# Altium PCB PCB1.PcbDoc
Units mm, origin at the board's own origin, x right, y up, seen from the top; angles counter-clockwise.
Board outline 52.07 x 50.16 mm, 2 copper layers (Top Layer, Bottom Layer); 9 components, 16 nets, 38 pads, 3 vias.
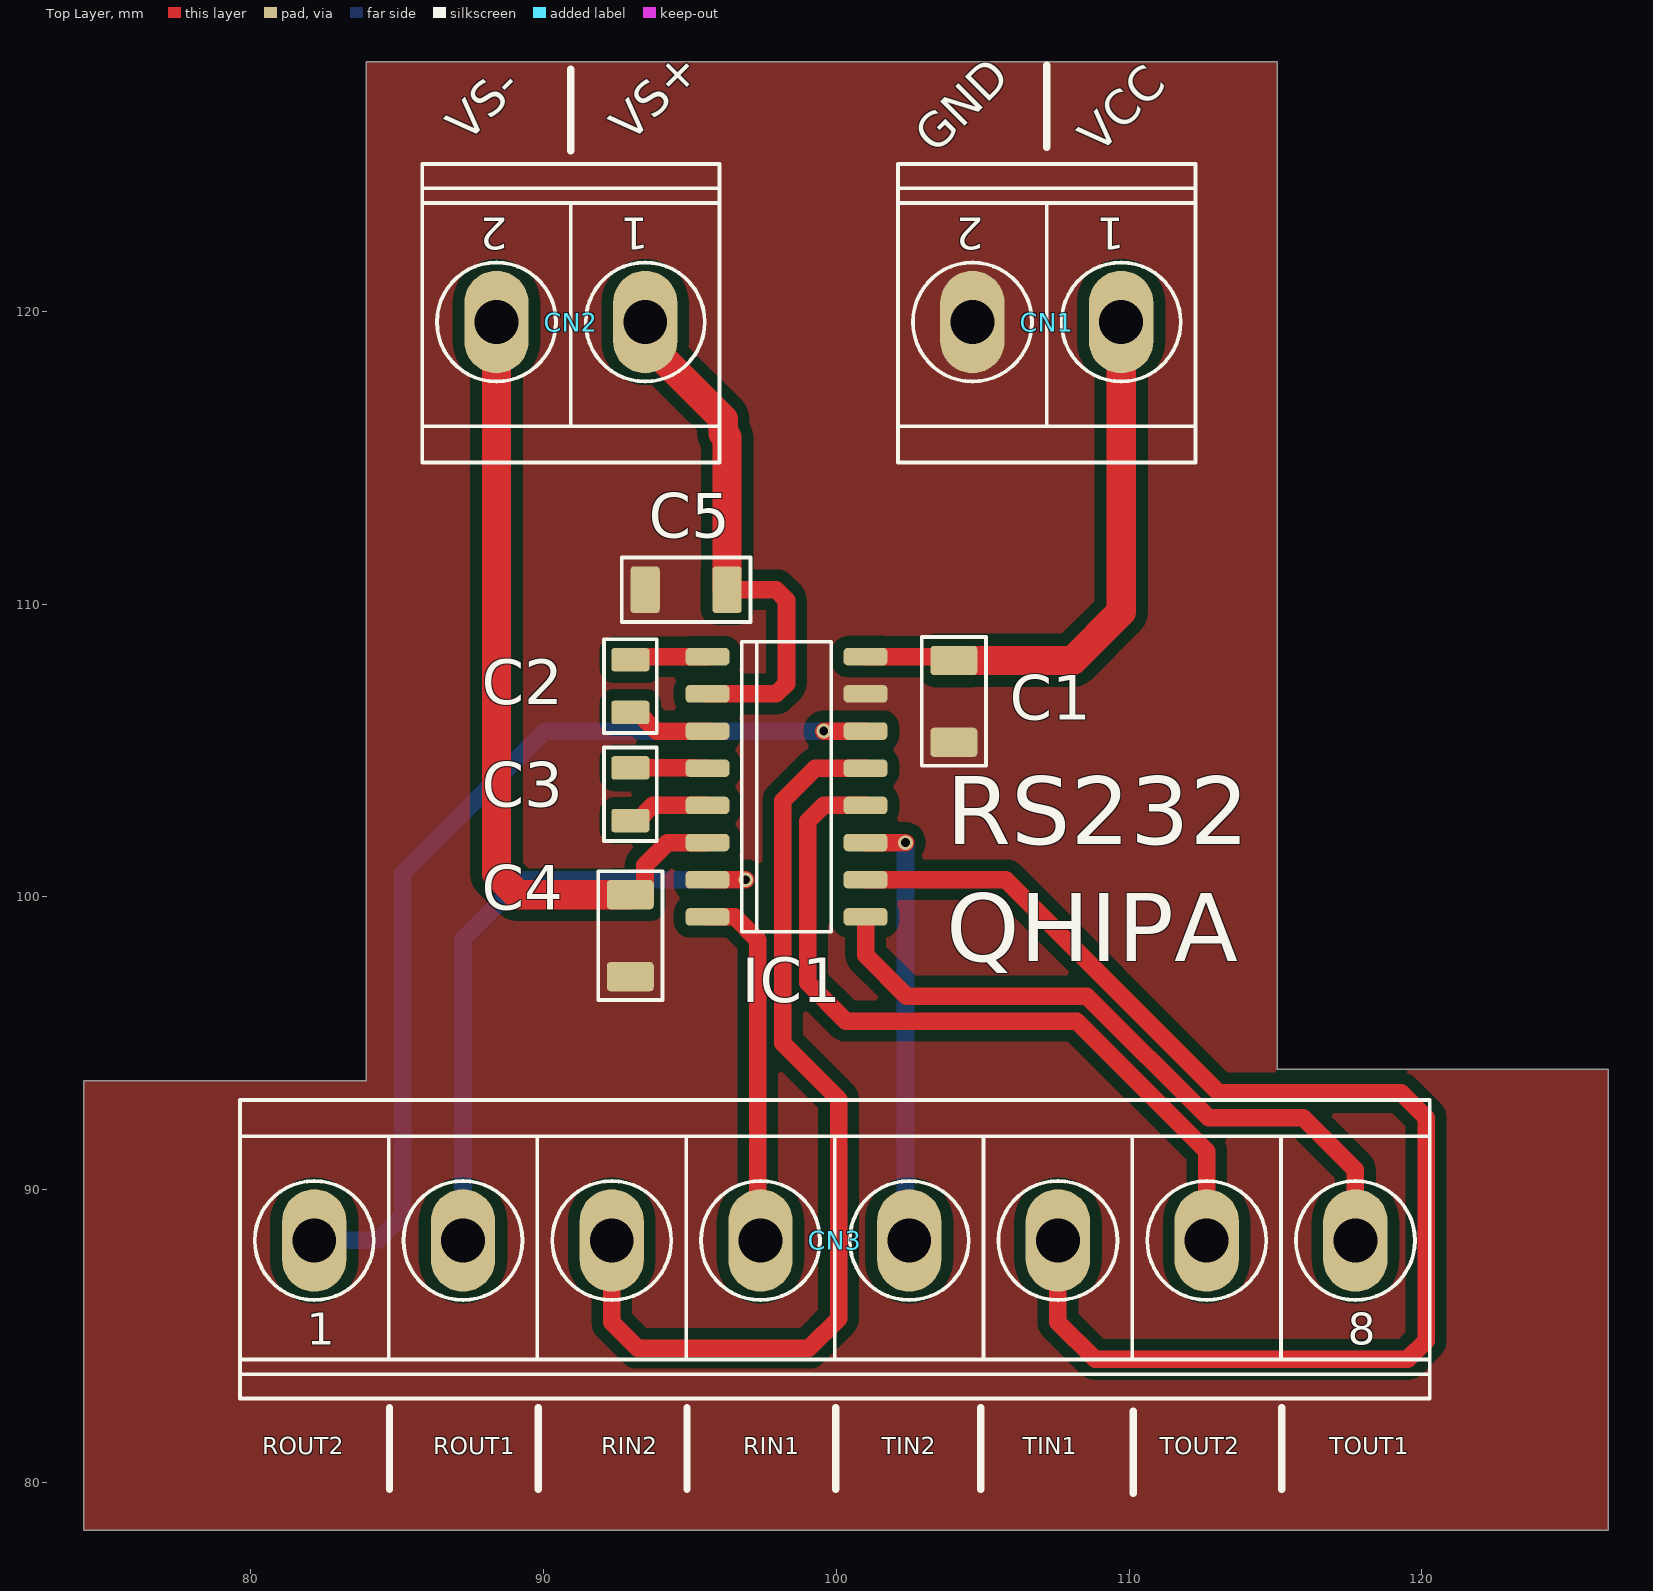
[diagram p0: Top Layer view]
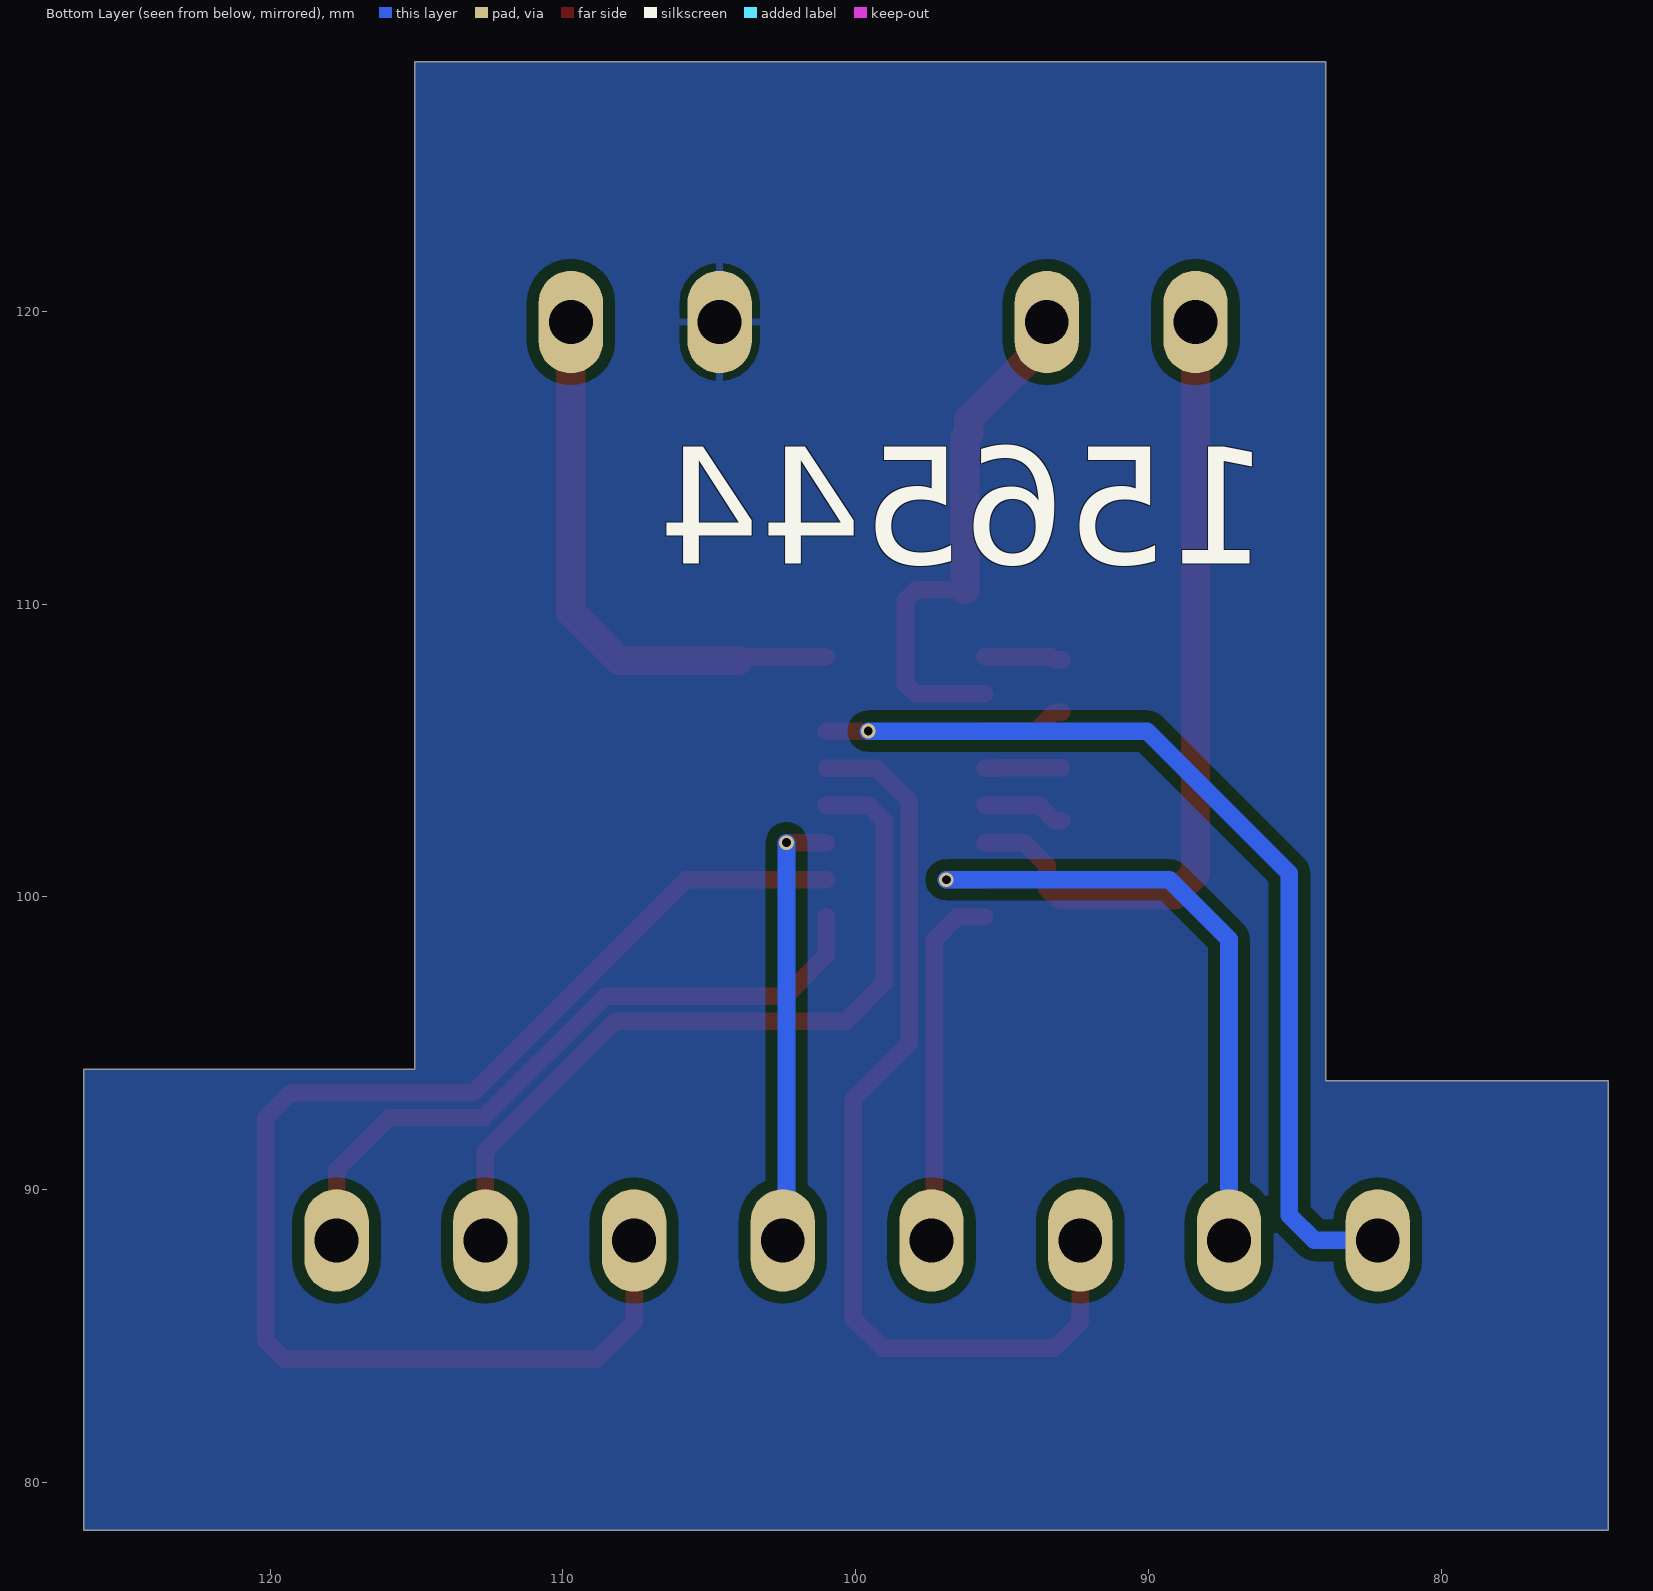
[diagram p1: Bottom Layer view, seen from below]

## Layer stack, top to bottom
Top Solder: solder mask 0.0102, Solder Resist, Dk 3.5
Top Layer: signal copper 0.0356
Dielectric 1: dielectric 0.32, FR-4, Dk 4.8
Bottom Layer: signal copper 0.0356
Bottom Solder: solder mask 0.0102, Solder Resist, Dk 3.5

## Board outline
74.295,78.359 74.295,93.726 83.947,93.726 83.947,128.524 115.062,128.524 115.062,94.107 126.365,94.107 126.365,78.359

## Design rules (kind name [scope] priority, off if disabled: settings)
Clearance [All] p1: gap=0.254 ignorepadtopadclearanceinfootprint=FALSE except(0: Arc-Hole Track-Hole SMDPad-Hole THPad-Hole Via-Hole Fill-Hole Poly-Hole Region-Hole Text-Hole; 0.4: Arc-Fill Arc-Poly Arc-Region Track-Fill Track-Poly Track-Region SMDPad-Fill SMDPad-Poly SMDPad-Region THPad-Fill THPad-Poly THPad-Region Via-Fill Via-Poly Via-Region Fill-Fill Fill-Poly Fill-Region Poly-Poly Poly-Region Region-Region)
PlaneConnect [All] p1: planeconnectstyle=Direct reliefexpansion=0.508 reliefentries=4 reliefconductorwidth=0.254 reliefairgap=0.254
PolygonConnect [All] p1: connectstyle=Direct reliefconductorwidth=0.254 reliefentries=4 polygonreliefangle="90 Angle" airgapwidth=0.254
RoutingVias [All] p1: holewidth=0.711 width=1.27 viastyle="Through Hole" minholewidth=0.711 minwidth=1.27 maxholewidth=0.711 maxwidth=1.27
SolderMaskExpansion [All] p1: expansion=0.102 istentingtop=FALSE
Width [All] p1: maxlimit=1 minlimit=0.4 preferedwidth=0.6
29 further rules are at their usual default settings.

## Components (designator, comment, footprint, x,y, rotation, side; value= is the part's Value field where it differs from the comment)
C1 "1uF" C1206 104.013,106.677 r270 top value=100nF
C2 "1uF" C0805 92.964,107.199 r270 top value=100nF
C3 "1uF" C0805 92.964,103.505 r270 top value=100nF
C4 "1uF" C1206 92.964,98.676 r90 top value=100nF
C5 "1uF" C1206 94.869,110.49 r0 top value=100nF
CN1 "TB508-02" TB508-02 107.188,119.634 r180 top
CN2 "TB508-02" TB508-02 90.932,119.634 r180 top
CN3 "TB08" TB508-08 99.949,88.265 r0 top
IC1 "MAX232EIDR" SOIC16-N 98.298,103.759 r0 top

## Footprints (in the part's own frame and the unit in brackets; to place one, negate y for a bottom-side part, rotate by r counter-clockwise, add the part's x,y. Pads: shape width x height; smd on the part's side, far side on the other; paste and mask are expansions set on the pad)
C0805 [mm] "Ceramic capacitor 0805"
  rrect25% 0.8x1.3 smd: 1(-0.9,0) 2(0.9,0)
  silkscreen extent -1.6,-0.9 1.6,0.9, body extent -1,-0.62 1,0.63, height 0.8
C1206 [mm] "SMT CAPACITOR 1206"
  rrect25% 1x1.6 smd: 1(-1.4,0) 2(1.4,0)
  silkscreen extent -2.2,-1.1 2.2,1.1, body extent -1.6,-0.8 1.6,0.8, height 0.94
SOIC16-N [mm] "SOIC16, 16-SOIC (0.154\", 3.90mm Width)"
  rrect50% 1.5x0.6 smd: 1(-2.7,4.445) 2(-2.7,3.175) 3(-2.7,1.905) 4(-2.7,0.635) 5(-2.7,-0.635) 6(-2.7,-1.905) 7(-2.7,-3.175) 8(-2.7,-4.445) 9(2.7,-4.445) 10(2.7,-3.175) 11(2.7,-1.905) 12(2.7,-0.635) 13(2.7,0.635) 14(2.7,1.905) 15(2.7,3.175) 16(2.7,4.445)
  silkscreen extent -1.52,-4.95 1.52,4.95, body extent -3,-4.95 3,4.95, height 1.4
TB508-02 [mm] "Vertical terminal block 0.2 inch (5.08mm) pitch"
  oval 2.2x3.5 hole 1.5: 1(-2.54,0) 2(2.54,0)
  silkscreen extent -5.08,-5.4 5.08,4.8, body extent -5.67,-4.75 5.06,4.75, height 15
TB508-08 [mm] "Vertical terminal block 0.2 inch (5.08mm) pitch"
  oval 2.2x3.5 hole 1.5: 1(-17.78,0) 2(-12.7,0) 3(-7.62,0) 4(-2.54,0) 5(2.54,0) 6(7.62,0) 7(12.7,0) 8(17.78,0)
  silkscreen extent -20.32,-5.4 20.32,4.8, body extent -20.86,-4.67 20.35,4.83, height 15.03

## Part data
C1 C2 C3 C4 C5: library part Capacitor, "Capacitor without polarity", Voltage=25V
CN1 CN2: library part TB-02, "Terminal Block"
CN3: library part TB-08, "Terminal Block"
IC1: library part MAX232, "2/2 Transceiver Full RS232 16-SOIC"

## Via types
v1: diameter 0.5, hole 0.3, Top Layer to Bottom Layer, tented both sides, 3 vias

## Nets (pads, with @x,y where several pads share a name; then routed paths per layer and width w, separated by ;. In a path a pad name is that pad's centre, name@x,y a point inside that pad or via, vN(x,y) a via of type N, cw(c..) or ccw(c..) an arc to the next point about the centre after c; other vN are vias at no path point)
GND: C1.2 C4.1 C5.1 CN1.2 IC1.15
NetC2_1: C2.1 IC1.1 | length 2.7
  Top Layer w0.6: C2.1 93.214,108.099 93.319,108.204 IC1.1
NetC2_2: C2.2 IC1.3 | length 2.9
  Top Layer w0.6: C2.2 93.214,106.299 93.849,105.664 IC1.3
NetC3_1: C3.1 IC1.4 | length 2.6
  Top Layer w0.6: C3.1 95.137,104.405 95.148,104.394 IC1.4
NetC3_2: C3.2 IC1.5 | length 2.8
  Top Layer w0.6: C3.2 93.214,102.605 93.733,103.124 IC1.5
RIN1: CN3.4 IC1.8 | length 12.4
  Top Layer w0.6: IC1.8 96.52,99.314 96.525,99.319 97.317,98.528 97.317,88.357 CN3.4
RIN2: CN3.3 IC1.13 | length 33.1
  Top Layer w0.6: CN3.3 92.329,85.471 93.218,84.582 99.06,84.582 100.076,85.598 100.076,93.091 98.171,94.996 98.171,103.281 99.284,104.394 IC1.13
ROUT1: CN3.2 IC1.7 | length 22.1
  Top Layer w0.6: IC1.7 v1(96.901,100.584)
  Bottom Layer w0.6: CN3.2 87.249,98.552 89.281,100.584 v1(96.901,100.584)
ROUT2: CN3.1 IC1.14 | length 32.9
  Top Layer w0.6: v1(99.568,105.664) IC1.14
  Bottom Layer w0.6: CN3.1 84.328,88.265 85.185,89.122 85.185,100.806 90.043,105.664 v1(99.568,105.664)
TIN1: CN3.6 IC1.10 | length 46.3
  Top Layer w0.6: IC1.10 105.793,100.584 113.067,93.31 119.288,93.31 120.142,92.456 120.142,84.836 119.507,84.201 108.839,84.201 107.569,85.471 CN3.6
TIN2: CN3.5 IC1.11 | length 15
  Top Layer w0.6: IC1.11 v1(102.362,101.854)
  Bottom Layer w0.6: v1(102.362,101.854) 102.362,88.392 CN3.5
TOUT1: CN3.8 IC1.9 | length 23.5
  Top Layer w0.6: IC1.9 100.998,98.011 102.397,96.612 108.558,96.612 112.714,92.456 115.951,92.456 117.729,90.678 CN3.8
TOUT2: CN3.7 IC1.12 | length 26.8
  Top Layer w0.6: IC1.12 99.568,103.124 99.025,102.581 99.025,97.063 100.33,95.758 108.204,95.758 112.649,91.313 CN3.7
VCC: C1.1 CN1.1 IC1.16 | length 19.4
  Top Layer w0.6: IC1.16 103.886,108.204 C1.1
  Top Layer w1: C1.1 108.077,108.077 109.728,109.728 CN1.1
VS+: C5.2 CN2.1 IC1.2 | length 18.2
  Top Layer w0.6: IC1.2 97.947,106.934 98.298,107.285 98.298,110.139 97.947,110.49 C5.2
  Top Layer w1: CN2.1 93.472,118.984 96.139,116.317 96.139,115.824 96.269,115.694 C5.2
VS-: C4.2 CN2.2 IC1.6 | length 27.6
  Top Layer w0.6: C4.2 93.264,100.076 93.464,100.276 93.464,101.084 94.234,101.854 IC1.6
  Top Layer w1: CN2.2 88.392,100.789 89.105,100.076 C4.2

## Polygon pours and split planes (outlines as drawn)
GND on Top Layer "GND_L01_P000" (solid, pour order 0): 74.295,78.359 74.295,93.726 83.947,93.726 83.947,128.524 115.062,128.524 115.062,94.107 126.365,94.107 126.365,78.359
GND on Bottom Layer "GND_L02_P001" (solid, pour order 1): 74.295,78.359 74.295,93.726 83.947,93.726 83.947,128.524 115.062,128.524 115.062,94.107 126.365,94.107 126.365,78.359

## Silkscreen, mask and mechanical layers (free items; w line width, h text height)
Top Overlay:
  lines w0.254: 84.739,79.764 84.739,82.558 ; 89.819,79.764 89.819,82.558 ; 90.932,125.476 90.932,128.27 ; 94.899,79.764 94.899,82.558 ; 99.979,79.764 99.979,82.558 ; 104.932,79.764 104.932,82.558 ; 107.188,125.603 107.188,128.397 ; 110.139,79.637 110.139,82.431 ; 115.219,79.764 115.219,82.558
  text "VS-" at 87.664,125.445 h2 r45
  text "VS+" at 93.252,125.445 h2 r45
  text "GND" at 103.664,125.063 h2 r45
  text "VCC" at 109.254,125.064 h2 r45
  text "RS232 / QHIPA" at 103.759,97.03 h4
  text "RIN2" at 91.967,80.763 h1
  text "RIN1" at 96.82,80.763 h1
  text "TIN2" at 101.556,80.763 h1
  text "TIN1" at 106.359,80.763 h1
  text "ROUT2" at 80.391,80.755 h1
  text "ROUT1" at 86.237,80.755 h1
  text "TOUT2" at 111.044,80.755 h1
  text "TOUT1" at 116.84,80.755 h1
Bottom Overlay:
  text "156544" at 85.852,111.379 h4
Mechanical 1:
  lines w0.254: 74.295,78.359 126.365,78.359 126.365,94.107 115.062,94.107 115.062,128.524 83.947,128.524 83.947,125.857 83.947,93.726 74.295,93.726 74.295,78.359

## Text inside footprints (layer, text, board x,y; h text height)
CN1: Top Overlay "1" at 109.855,123.19 h1.1 r180; Top Overlay "2" at 105.029,123.19 h1.1 r180
CN2: Top Overlay "1" at 93.599,123.19 h1.1 r180; Top Overlay "2" at 88.773,123.19 h1.1 r180
CN3: Top Overlay "8" at 117.475,84.709 h1.1; Top Overlay "1" at 81.915,84.709 h1.1